# EAGLE board Margo_PCB v15 (EAGLE 9.7.0)
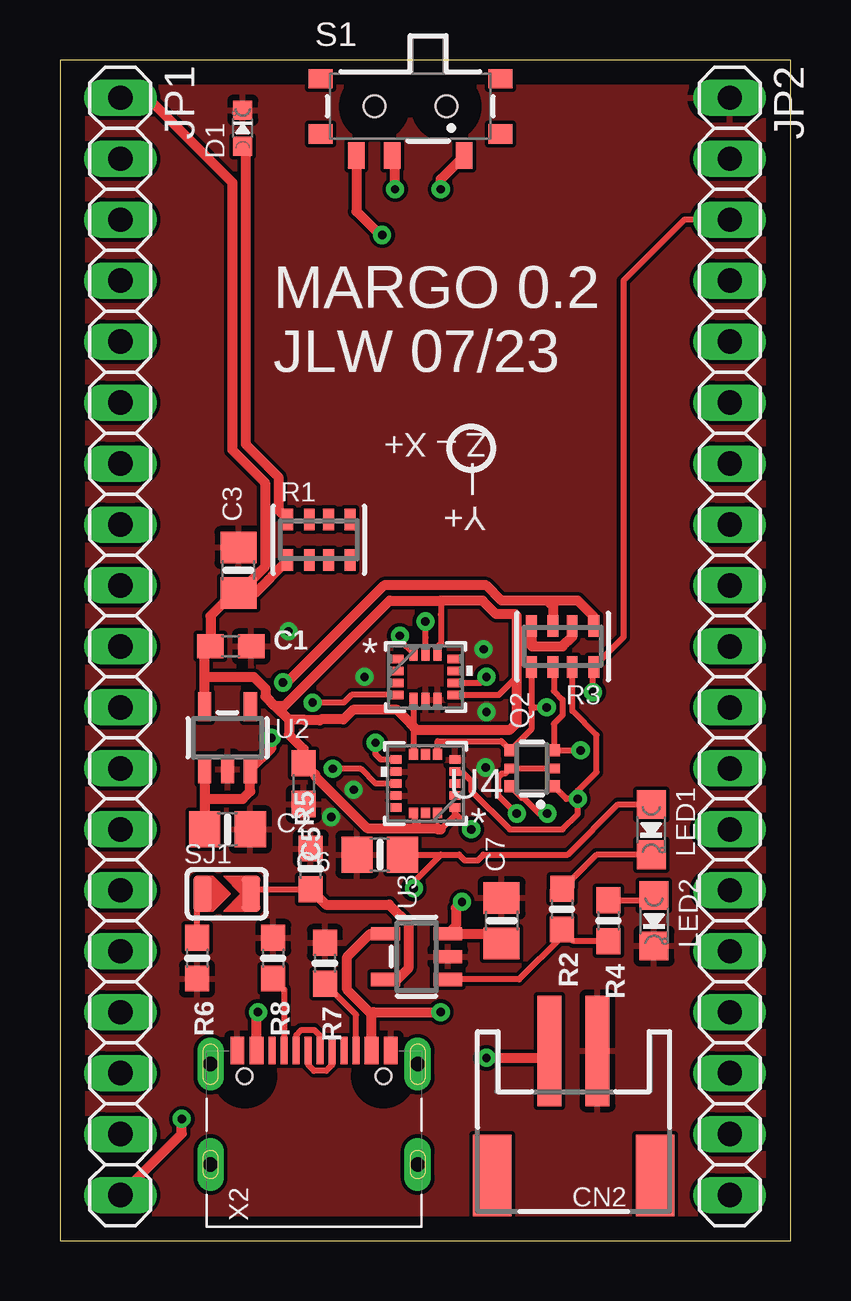
[diagram p0: board, top side]
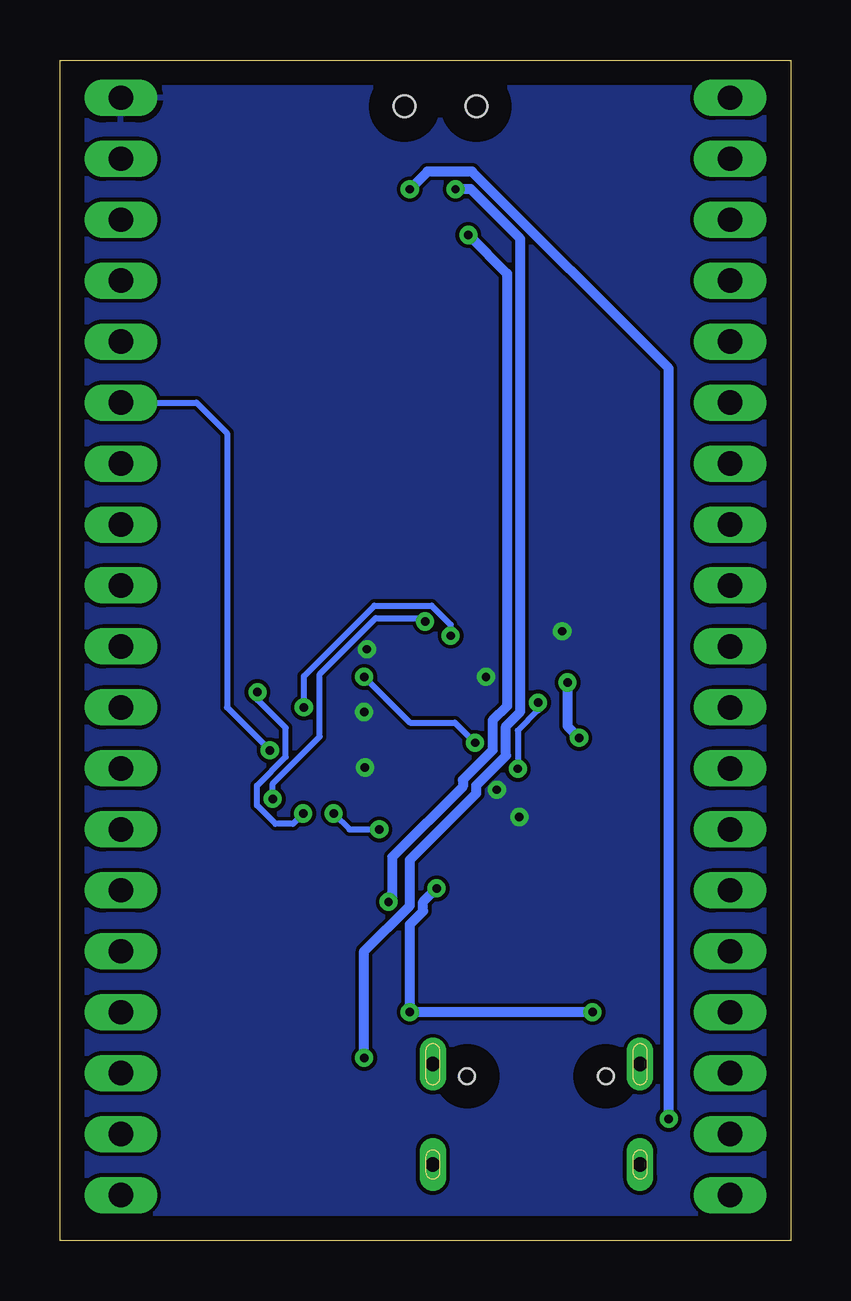
[diagram p1: board, bottom side, seen from below]

Size 30.46 x 49.2 mm. Coordinates in mm from the lower left corner, seen from the top.
Outline: 0,0 30.46,0 30.46,49.2 0,49.2 0,0
Copper layers (1*16): Top 0.035mm / dielectric 1.5mm / Bottom 0.035mm
Design rules "default": minimum track width 6mil, minimum drill 0.35mm, track to track 6mil, track to pad 6mil, pad to pad 6mil, via to via 6mil, smd to smd 6mil, copper to edge 40mil, drill to drill 6mil, minimum pad ring 10mil, minimum via ring 8mil, stop-mask expansion 4mil, vias tented up to drill 0mil, thermal gap 10mil

## Footprints (pad centres in the part's own frame; a part is rotated, then mirrored left to right if it is on the bottom)
0603-NO@1 = smd 1.1 x 1: 1 -0.85,0; 2 0.85,0
0805-NO@1 = smd 1.3 x 1.5: 1 -0.95,0; 2 0.95,0
JSTPH2 = smd 1 x 4.6: 1 -1,-3.7; 2 1,-3.7 | smd 1.6 x 3.4: NC1 -3.4,1.5; NC2 3.4,1.5
CHIPLED_0603_NOOUTLINE = smd 0.8 x 0.8: A 0,-0.75; C 0,0.75
1X19 = drill 1.016 long: 1 -22.86,0; 2 -20.32,0; 3 -17.78,0; 4 -15.24,0; 5 -12.7,0; 6 -10.16,0; 7 -7.62,0; 8 -5.08,0; 9 -2.54,0; 10 0,0; 11 2.54,0; 12 5.08,0; 13 7.62,0; 14 10.16,0; 15 12.7,0; 16 15.24,0; 17 17.78,0; 18 20.32,0; 19 22.86,0
CHIPLED_0805_NOOUTLINE = smd 1.2 x 1.2: A 0,-1.05; C 0,1.05
SOT363 = smd 0.5 x 0.5: 1 -0.75,-0.9; 3 0.75,-0.9; 4 0.75,0.9; 6 -0.75,0.9 | smd 0.4 x 0.5: 2 0,-0.9; 5 0,0.9
RESPACK_4X0603 = smd 0.45 x 0.9: 1 -1.3,-0.85; 2 -0.4,-0.85; 3 0.4,-0.85; 4 1.3,-0.85; 5 1.3,0.85; 6 0.4,0.85; 7 -0.4,0.85; 8 -1.3,0.85
0603-NO = smd 1.075 x 1: 1 -0.85,0; 2 0.85,0
450404015514 = smd 0.7 x 1.1: 1 2.25,-2.05; 2 -0.75,-2.05; 3 -2.25,-2.05 | smd 1 x 0.8: Z1 -3.75,1.15; Z2 3.75,1.15; Z3 3.75,-1.15; Z4 -3.75,-1.15 | hole 0.9: -1.5,0; 1.5,0
SOLDERJUMPER_ARROW_NOPASTE = smd 0.762 x 1.524: 1 -1.016,0; 2 1.016,0
LGA-14L_2P5X3X0P86_STM = smd 0.577 x 0.351: 1 -1.21,0.75; 2 -1.21,0.25; 3 -1.21,-0.25; 4 -1.21,-0.75; 8 1.21,-0.75; 9 1.21,-0.25; 10 1.21,0.25; 11 1.21,0.75 | smd 0.351 x 0.577: 5 -0.5,-0.956; 6 0,-0.956; 7 0.5,-0.956; 12 0.5,0.956; 13 0,0.956; 14 -0.5,0.956
SOT23-5 = smd 0.55 x 1.2: 1 -0.95,-1.3; 2 0,-1.3; 3 0.95,-1.3; 4 0.95,1.3; 5 -0.95,1.3
LGA-16_3X3X1MM_STM-L = smd 0.457 x 0.356: 1 -1.225,1; 2 -1.225,0.5; 3 -1.225,0; 4 -1.225,-0.5; 5 -1.225,-1; 9 1.225,-1; 10 1.225,-0.5; 11 1.225,0; 12 1.225,0.5; 13 1.225,1 | smd 0.356 x 0.457: 6 -0.5,-1.225; 7 0,-1.225; 8 0.5,-1.225; 14 0.5,1.225; 15 0,1.225; 16 -0.5,1.225
USB_C_CUSB31-CFM2AX-01-X = smd 0.575 x 1.15: A1B12 -3.2,7.355; A4B9 -2.4,7.355; B1A12 3.2,7.355; B4A9 2.4,7.355 | smd 0.275 x 1.15: A5 -1.25,7.355; A6 -0.25,7.355; A7 0.25,7.355; A8 1.25,7.355; B5 1.75,7.355; B6 0.75,7.355; B7 -0.75,7.355; B8 -1.75,7.355 | drill 0.6 pad 1 long: M1 -4.32,6.78; M2 4.32,6.78; M3 -4.32,2.6; M4 4.32,2.6 | hole 0.65: 2.89,6.28; -2.89,6.28

## Placement (x,y rotation side)
C1  0.1uF  [0603-NO@1]  7.12,24.76 0 top
C2  10uF  [0805-NO@1]  6.98,17.14 0 top
C3  10uF  [0805-NO@1]  7.44,27.94 90 top
C5  1uF  [0603-NO@1]  10.16,19.05 270 top
C6  10µF  [0805-NO@1]  13.33,16.09 180 top
C7  10µF  [0805-NO@1]  18.42,13.34 90 top
CN2  JSTPH  [JSTPH2]  21.41,4.22 180 top
D1  GREEN  [CHIPLED_0603_NOOUTLINE]  7.62,46.36 0 top
JP1  [1X19]  2.52,24.76 270 top
JP2  [1X19]  27.93,24.76 270 top
LED1  RED  [CHIPLED_0805_NOOUTLINE]  24.65,17.13 180 top
LED2  GREEN  [CHIPLED_0805_NOOUTLINE]  24.77,13.34 180 top
Q2  BSS138  [SOT363]  19.69,19.68 90 top
R1  10K  [RESPACK_4X0603]  10.79,29.21 0 top
R2  470  [0603-NO]  20.93,13.82 269.5 top
R3  10K  [RESPACK_4X0603]  20.96,24.76 180 top
R4  470  [0603-NO]  22.86,13.34 270 top
R5  10K\  [0603-NO]  10.46,15.49 90 top
R6  2.2K  [0603-NO]  5.71,11.78 270 top
R7  5.1K  [0603-NO]  11.05,11.56 270 top
R8  5.1K  [0603-NO]  8.89,11.78 270 top
S1  [450404015514]  14.61,47.27 0 top
SJ1  [SOLDERJUMPER_ARROW_NOPASTE]  6.95,14.46 0 top
U1  LSM6DSOTRLGA-14L_2P5X3X0P86_STM  [LGA-14L_2P5X3X0P86_STM]  15.24,23.49 0 top
U2  AP2112K-3.3  [SOT23-5]  6.98,20.95 0 top
U3  MCP73831T-2ACI/OT  [SOT23-5]  14.87,11.84 90 top
U4  LIS3DHTRLGA-16_3X3X1MM_STM-L  [LGA-16_3X3X1MM_STM-L]  15.24,19.05 180 top
X2  [USB_C_CUSB31-CFM2AX-01-X]  10.59,0.58 0 top

## Library data of the parts
C1-C3 C5-C7 CN2 D1 LED1 LED2 Q2 R1-R8 U2 U3 X2 = microbuilder
JP1 JP2 = pinhead
S1 = Wurth_Switch_WS-SLSU; DATASHEET-URL: https://www.we-online.com/catalog/datasheet/450404015514.pdf; IR: 300mA; PACKAGING: Tape and Reel; PART-NUMBER: 450404015514; QTY: 150; VR: 5V(DC)
SJ1 = microbuilder; BOM: EXCLUDE
U1 = 2023-07-02_00-41-56_Library; COPYRIGHT: Copyright (C) 2023 Ultra Librarian. All rights reserved.; MANUFACTURER_PART_NUMBER: LSM6DSOTR; MFR_NAME: STMicroelectronics
U4 = 2023-07-03_16-58-06_Library; COPYRIGHT: Copyright (C) 2023 Ultra Librarian. All rights reserved.; MANUFACTURER_PART_NUMBER: LIS3DHTR; MFR_NAME: STMicroelectronics

## Nets
3.3V [lowpower]: C1.1 C3.1 C5.1 JP1.1 Q2.2 Q2.5 R1.1 R3.2 R3.4 U1.5 U1.8 U1.12 U2.5 U4.1 U4.8 U4.14
5V: C6.1 LED1.A U3.4 X2.A4B9 X2.B4A9
ADAG: U1.1
ADM: U4.7
CC1: R8.2 X2.A5
CC2: R7.2 X2.B5
D+: X2.A6 X2.B6
D-: X2.A7 X2.B7
EXT_5V: JP1.19 S1.1
GND: C1.2 C2.2 C3.2 C5.2 C6.2 C7.2 CN2.1 D1.C JP2.1 LED2.C R5.2 R6.2 R7.1 R8.1 U1.6 U1.7 U2.2 U3.2 U4.5 U4.10 U4.12 X2.A1B12 X2.B1A12
INT1: U1.4 U4.11
INT2: U1.9 U4.9
N$1: D1.A R1.8
N$2: LED1.C R2.1
N$3: R2.2 R4.2 U3.1
N$4: R6.1 SJ1.1
N$5: R5.1 SJ1.2 U3.5
N$6: LED2.A R4.1
N$7: CN2.2 S1.2
N$8: U4.16
N$9: U4.15
N$10: U4.13
SCL: JP2.3 Q2.6 R3.8
SCL_3V: Q2.1 R3.7 U1.13 U4.4
SDA: JP2.6 Q2.3 R3.6
SDA_3V: Q2.4 R3.5 U1.14 U4.6
VBAT: C7.1 S1.3 U3.3
VCC [lowpower]: C2.1 R3.1 R3.3 U2.1 U2.3

## Tracks (layer width: path | path; a pad name or v marks a point on that pad's centre or on a via)
3.3V  (via drill 0.35)
  Top 0.254: Q2.2 Q2.5 18.56,19.46 18.42,19.46 18.26,19.3 18.26,18.57 19.02,17.8 v19.05,17.8 | U4.14 14.78,17.78 14.78,17.48 15.12,17.14 15.88,17.14 16.46,17.73 U4.1 16.46,17.82 v17.15,17.14 | U1.8 18.3,22.74 19.05,23.49 | U4.8 U1.5 14.74,21.72 14.6,21.58 | U1.12 15.74,24.75 15.89,24.9 15.89,26.08 15.88,26.1 15.88,26.67
  Top 0.406: U2.5 6.04,23.49 | 6.04,23.49 6.04,24.53 C1.1 6.27,26.04 7.23,26.99 C3.1 | C3.1 8.12,26.99 R1.1 | 15.88,17.14 15.77,17.14 15.72,17.19 12.81,17.19 10.64,19.36 10.64,19.42 C5.1 10.16,20.48 9.55,21.1 9.55,21.7 | 6.04,23.49 8.07,23.49 8.57,23 8.57,22.68 8.96,22.29 | 19.05,25.4 19.05,23.49 19.05,21.59 18.76,21.3 14.87,21.3 14.6,21.58 14.06,22.12 12.21,22.12 11.82,21.72 10.87,21.72 10.83,21.69 10.23,21.69 10.21,21.7 9.55,21.7 | 19.05,25.4 19.05,26.04 18.97,26.11 18.18,26.11 17.62,26.67 15.88,26.67 13.74,26.67 9.36,22.29 8.96,22.29 | 8.96,22.29 9.55,21.7 | 19.05,25.4 19.44,25.4 R3.4 19.66,24.79 19.69,24.76 20.96,24.76 21.36,25.16 R3.2 | C3.1 8.34,27.88 8.55,28.09 8.55,31.59 7.18,32.96 7.18,44.11 3.66,47.62 JP1.1
  Bottom 0.254: v19.05,17.8 18.39,17.14 v17.15,17.14
5V  (via drill 0.35)
  Top 0.254: C6.1 15.88,16.09 | LED1.A 23.26,18.18 21.17,16.09 17.65,16.09 17.42,15.85 16.87,15.85 16.64,16.09 15.88,16.09 | 15.88,16.09 14.76,14.97 v14.76,14.68
  Top 0.406: U3.4 12.93,12.79 11.98,11.84 11.98,10.47 12.99,9.45 | X2.B4A9 12.99,9.45 | 12.99,9.45 13.07,9.53 v15.88,9.53 | X2.A4B9 8.2,9.46 v8.26,9.53
  Bottom 0.406: v8.26,9.53 v15.88,9.53 15.88,13.18 15.32,13.74 15.32,14.13 v14.76,14.68
CC1
  Top 0.254: X2.A5 9.35,10.47 R8.2
CC2
  Top 0.254: X2.B5 12.35,9.42 R7.2
D+
  Top 0.254: X2.A6 10.35,7.33 10.59,7.08 11.1,7.08 11.35,7.33 X2.B6
D-
  Top 0.254: X2.B7 9.85,8.58 10.06,8.79 10.6,8.79 10.85,8.54 X2.A7
EXT_5V  (via drill 0.35)
  Top 0.406: JP1.19 5.08,4.47 v5.08,5.08 | v15.88,43.82 15.88,44.24 S1.1
  Bottom 0.406: v5.08,5.08 5.08,36.35 13.28,44.55 15.14,44.55 v15.88,43.82
GND  (via drill 0.35)
  other vias: 17.78,22.04 17.74,19.72 17.66,24.65 12.7,23.49 9.53,25.4 12.25,18.79 11.31,17.66
  pour Bottom: 0.13,0.13 29.79,0.13 30.35,0.69 30.35,48.77 0.13,48.77
  pour Top: 0.13,0.13 29.79,0.13 30.35,0.69 30.35,48.77 0.13,48.77
INT1  (via drill 0.35)
  Top 0.254: U4.11 13.16,19.05 12.55,19.67 v11.37,19.67 | v10.53,22.42 11.83,22.42 12.16,22.74 U1.4
  Bottom 0.254: v10.53,22.42 10.53,22.1 11.37,21.26 v11.37,19.67
INT2  (via drill 0.35)
  Top 0.254: U1.9 17.53,23.24 v17.78,23.49 | U4.9 13.38,20.05 13.15,20.28 v13.15,20.75
  Bottom 0.254: v17.78,23.49 15.88,21.59 13.99,21.59 v13.15,20.75
N$1
  Top 0.406: D1.A 7.74,45.48 7.74,33.19 9.11,31.82 9.11,30.45 R1.8
N$2
  Top 0.254: R2.1 20.96,14.67 22.37,16.08 LED1.C
N$3
  Top 0.254: R4.2 21.41,12.48 R2.2 20.92,12.67 19.15,10.89 U3.1
N$4
  Top 0.254: R6.1 5.71,14.24 SJ1.1
N$5
  Top 0.254: SJ1.2 8.15,14.64 R5.1
  Top 0.406: R5.1 11.09,14.01 13.73,14.01 14.52,13.21 14.52,11.35 14.06,10.89 U3.5
N$6
  Top 0.254: R4.1 24.57,14.19 LED2.A
N$7  (via drill 0.35)
  Top 0.406: v13.97,43.82 13.97,45.1 S1.2 | v17.78,7.62 20.12,7.62 CN2.2
  Bottom 0.406: v17.78,7.62 17.78,12.06 15.88,13.97 15.88,15.88 13.1,18.65 13.1,18.97 11.86,20.22 11.86,21.45 11.27,22.05 11.27,41.75 13.33,43.82 v13.97,43.82
SCL  (via drill 0.35)
  Top 0.254: v22.23,22.86 22.23,23.88 R3.8 23.5,25.15 23.5,40.01 26.04,42.55 JP2.3 | Q2.6 19.26,18.46 19.32,18.46 19.98,17.8 v20.32,17.8
  Bottom 0.254: v20.32,17.8 20.75,17.37 21.48,17.37 22.25,18.14 22.25,18.97 21.05,20.16 21.05,21.37 22.23,22.54 v22.23,22.86
SCL_3V  (via drill 0.35)
  Top 0.254: U4.4 16.51,19.51 16.81,19.51 17.15,19.17 17.15,18.75 18.76,17.14 20.96,17.14 21.59,17.78 v21.59,18.41 | v21.59,18.41 21.11,18.41 Q2.1 | U1.13 15.24,25.14 15.23,25.15 v15.23,25.81 | v21.59,18.41 21.59,18.75 22.37,19.53 22.37,21.07 21.36,22.08 R3.7
  Bottom 0.254: v21.59,18.41 21.59,19.05 19.63,21.01 19.63,23.61 17.3,25.94 15.37,25.94 v15.23,25.81
SDA  (via drill 0.35)
  Top 0.254: R3.6 20.59,23.88 20.59,22.91 20.95,22.55 20.95,21.9 20.59,21.54 Q2.3 20.44,20.43 20.44,20.44 v21.71,20.44
  Bottom 0.254: JP2.6 24.77,34.93 23.5,33.66 23.5,22.22 v21.71,20.44
SDA_3V  (via drill 0.35)
  Top 0.254: U4.6 15.74,20.82 18.4,20.82 Q2.4 19.66,21.3 19.66,22.22 | U1.14 14.18,25.01 v14.18,25.2 v14.17,25.21 | R3.5 19.66,22.22 | 19.66,22.22 v20.29,22.22
  Bottom 0.254: v14.17,25.21 14.17,25.68 14.96,26.46 17.35,26.46 20.29,23.52 v20.29,22.22
VBAT  (via drill 0.35)
  Top 0.406: C7.1 18.01,12.79 U3.3 16.51,13.13 16.51,13.87 v16.76,14.12 | S1.3 12.36,42.89 13.33,41.91 v13.43,41.91
  Bottom 0.406: v16.76,14.12 16.61,14.27 16.61,15.98 13.66,18.93 13.66,19.21 12.42,20.45 12.42,21.68 11.82,22.28 11.82,40.3 v13.43,41.91
VCC  (via drill 0.35)
  Top 0.406: U2.1 6.04,18.41 | 6.04,18.41 C2.1 | 6.04,18.41 7.62,18.41 7.93,18.73 U2.3 8.81,20.53 v8.81,20.95 | v9.3,23.26 9.47,23.26 13.51,27.3 17.78,27.3 18.42,26.67 20.32,26.67 | 20.32,26.67 20.56,26.43 R3.3 | R3.1 22.23,25.64 22.23,26.04 21.59,26.67 20.32,26.67
  Bottom 0.406: v8.81,20.95 9.3,21.44 v9.3,23.26

## Text on the board
tNames: MARGO 0.2 / JLW 07/23 | Y+ / | / Z – X+